# Altium PCB MCU-MUSIC PLAYER.pcbdoc
Units mil, origin at the board's own origin, x right, y up, seen from the top; angles counter-clockwise.
Board outline 3675.92 x 2845 mil, 2 copper layers (Top Layer, Bottom Layer); 23 components, 44 nets, 122 pads, 12 vias.
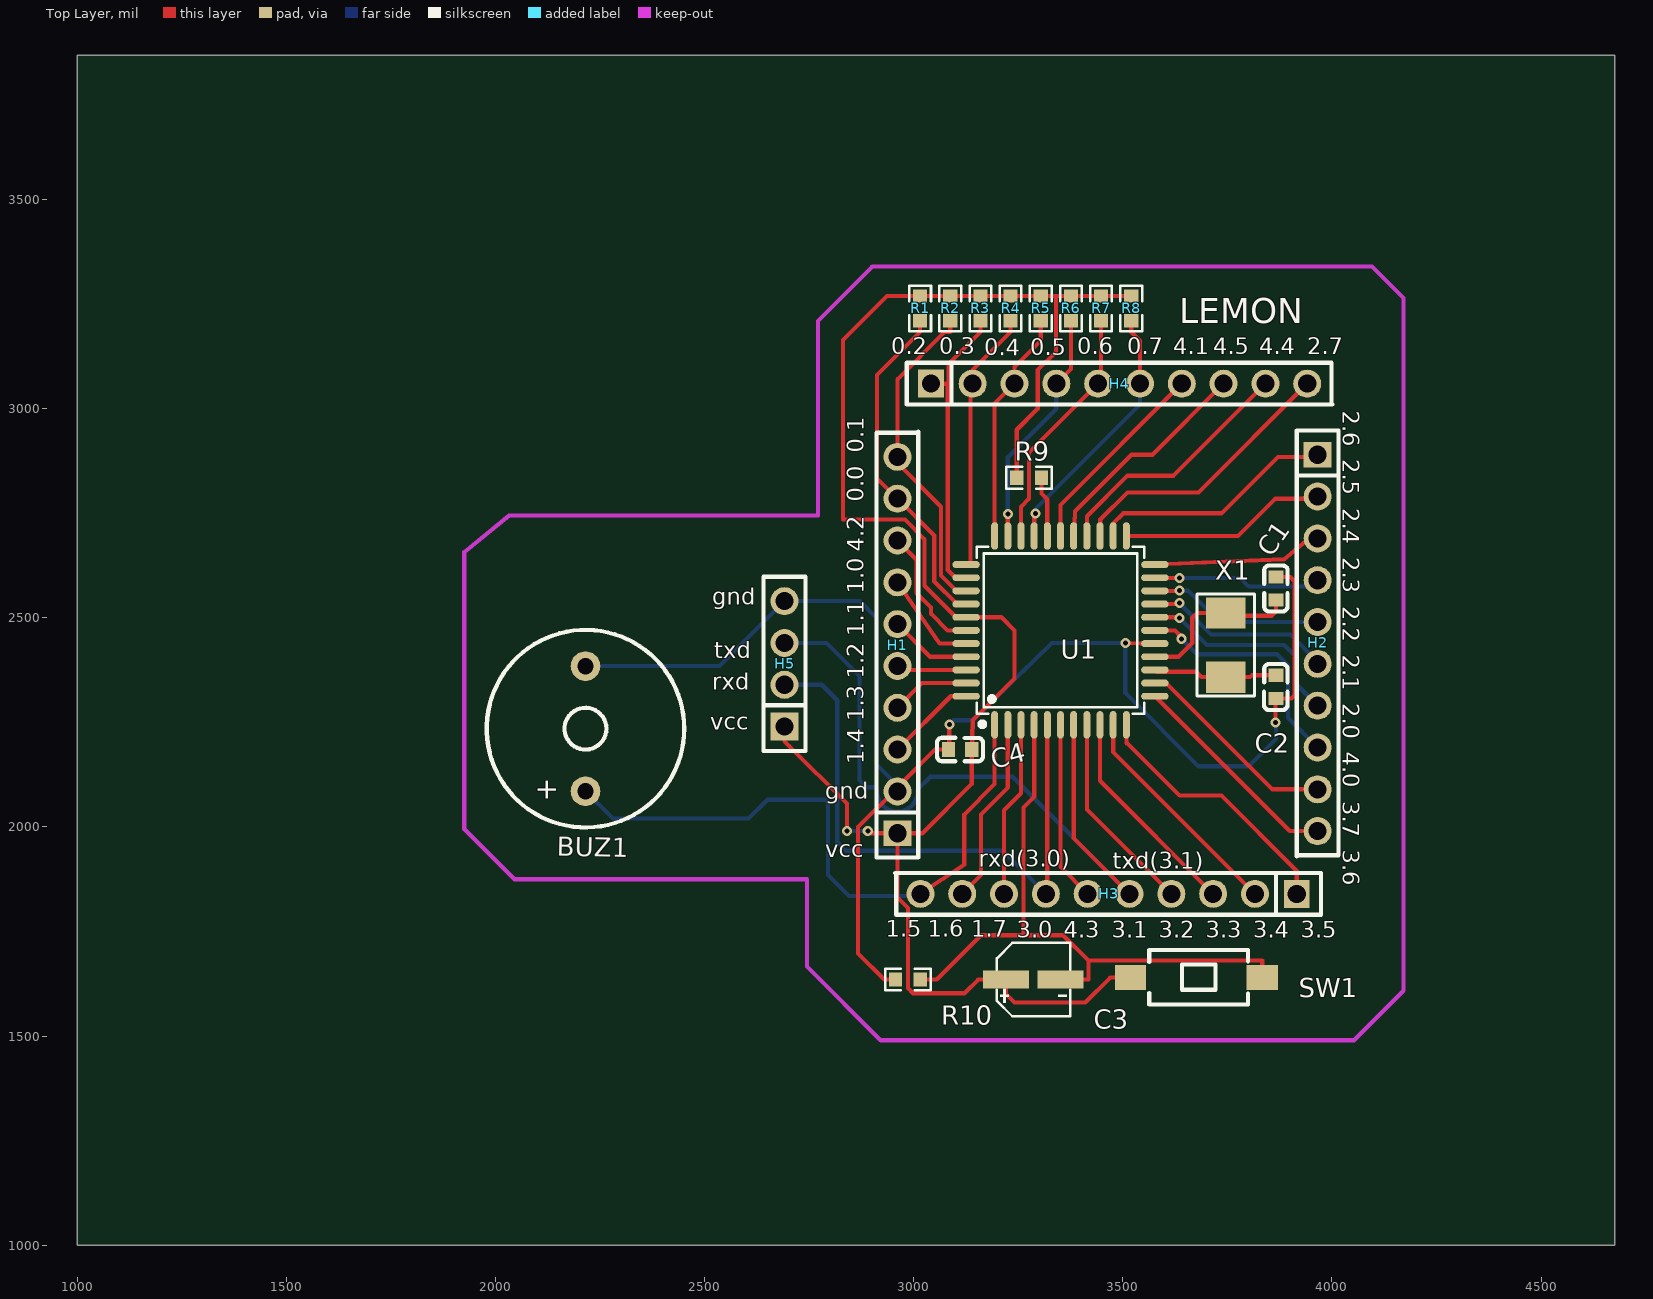
[diagram p0: Top Layer view]
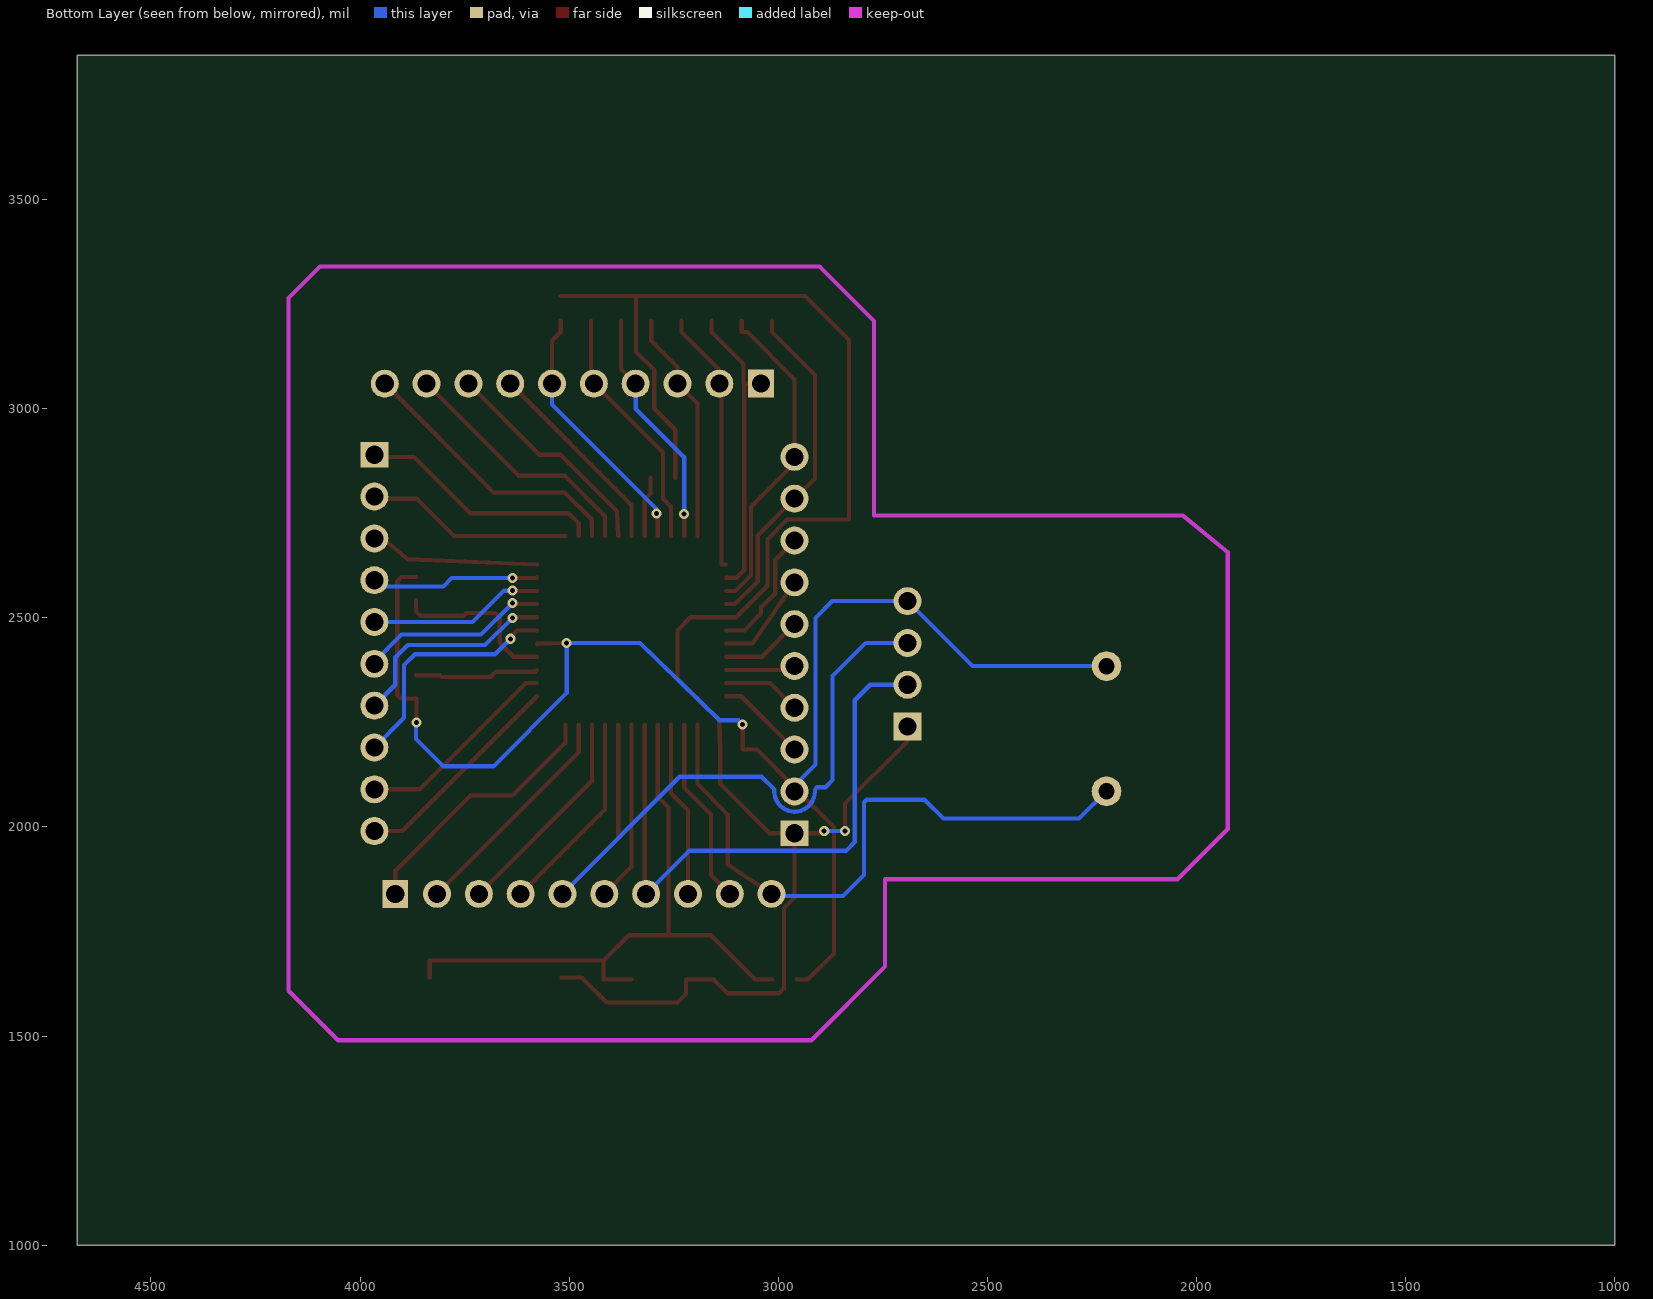
[diagram p1: Bottom Layer view, seen from below]

## Layer stack, top to bottom
Top Solder: solder mask 0.4, Solder Resist, Dk 3.5
Top Layer: signal copper 1.4
Dielectric1: dielectric 12.6, FR-4, Dk 4.8
Bottom Layer: signal copper 1.4
Bottom Solder: solder mask 0.4, Solder Resist, Dk 3.5

## Board outline
4675.92,1000 1000,1000 1000,3845 4675.92,3845

## Design rules (kind name [scope] priority, off if disabled: settings)
Clearance [All] p1: gap=6 ignorepadtopadclearanceinfootprint=FALSE except(66: THPad-Text)
PolygonConnect [All] p1: connectstyle=Relief reliefconductorwidth=10 reliefentries=4 polygonreliefangle="90 Angle" airgapwidth=10
RoutingVias [All] p1: holewidth=28 width=50 viastyle="Through Hole" minholewidth=28 minwidth=50 maxholewidth=28 maxwidth=50
SolderMaskExpansion [All] p1: expansion=4 istentingtop=FALSE
SupplyNets "Schematic Supply Nets_1" [InNet('GND')] p1: voltage=0.000
SupplyNets "Schematic Supply Nets" [InNet('VCC')] p2: voltage=0.000
Width [All] p1: maxlimit=10 minlimit=10 preferedwidth=10
30 further rules are at their usual default settings.

## Components (designator, comment, footprint, x,y, rotation, side; value= is the part's Value field where it differs from the comment)
BUZ1 "2.4kHz" BUZ-TH_BD12.0-P7.60-D0.6-FD 2215,2235 r90 top
C1 "22pf" C0603 3865.92,2570 r270 top
C2 "22pf" C0603 3865.92,2335 r90 top
C3 "10uF" CAP-SMD_BD4.0-L4.3-W4.3-LS5.0-FD 3285.92,1635 r0 top
C4 "0.1u" C0603 3110.92,2185 r0 top
H1 "PZ254-1-10-Z-8.5" HDR-TH_10P-P2.54-V-M 2960.92,2435 r90 top
H2 "PZ254-1-10-Z-8.5" HDR-TH_10P-P2.54-V-M 3965.92,2440 r270 top
H3 "PZ254-1-10-Z-8.5" HDR-TH_10P-P2.54-V-M 3465.92,1840 r180 top
H4 "PZ254-1-10-Z-8.5" HDR-TH_10P-P2.54-V-M 3490.92,3060 r0 top
H5 "Header-Male-2.54_1x4" HDR-TH_4P-P2.54-V-M 2690.92,2390 r90 top
R1 "10k" R0603 3015.22,3240 r90 top
R2 "10k" R0603 3087.32,3240 r90 top
R3 "10k" R0603 3159.52,3240 r90 top
R4 "10k" R0603 3231.62,3240 r90 top
R5 "10k" R0603 3303.82,3240 r90 top
R6 "10k" R0603 3375.92,3240 r90 top
R7 "10k" R0603 3448.02,3240 r90 top
R8 "10k" R0603 3520.22,3240 r90 top
R9 "4.7k" R0603 3275.92,2835 r180 top
R10 "10k" R0603 2985.92,1635 r0 top
SW1 "S" SW-SMD_L6.0-W3.3-LS8.0 3675.92,1640 r180 top
U1 "STC89C52RC-40I_C8707" LQFP-44_L10.0-W10.0-P0.80-LS12.0-BL 3350.92,2470 r0 top
X1 "11.0952" CRYSTAL-SMD_2P-L5.0-W3.2 3745.92,2435 r270 top

## Footprints (in the part's own frame and the unit in brackets; to place one, negate y for a bottom-side part, rotate by r counter-clockwise, add the part's x,y. Pads: shape width x height; smd on the part's side, far side on the other; paste and mask are expansions set on the pad)
BUZ-TH_BD12.0-P7.60-D0.6-FD [mm]
  round 1.8 hole 1 paste-2539.97: 1(-3.8,0) 2(3.8,0)
  silkscreen extent -6,-6 6,6
C0603 [mm]
  rect 0.8x0.9 smd paste+0 mask+0.051: 1(-0.7,0) 2(0.7,0)
  silkscreen extent -1.41,-0.71 1.39,0.72
CAP-SMD_BD4.0-L4.3-W4.3-LS5.0-FD [mm]
  rect 2.8x1.1 smd paste+0 mask+0.051: 1(-1.66,0) 2(1.66,0)
  silkscreen extent -2.22,-2.23 2.24,2.23
CRYSTAL-SMD_2P-L5.0-W3.2 [mm]
  rect 1.9x2.4 smd paste+0 mask+0.051: 1(-1.95,0) 2(1.95,0)
  silkscreen extent -3.1,-1.75 3.1,1.75
HDR-TH_4P-P2.54-V-M [mm]
  rect 1.7x1.7 hole 1.1 paste-2539.97 mask+0.051: 1(-3.81,0)
  round 1.7 hole 1.1 paste-2539.97 mask+0.051: 2(-1.27,0) 3(1.27,0) 4(3.81,0)
  silkscreen extent -5.29,-1.27 5.29,1.27
HDR-TH_10P-P2.54-V-M [mm]
  rect 1.575x1.7 hole 1.1 paste-2539.97 mask+0.051: 1(-11.43,0)
  round 1.7 hole 1.1 paste-2539.97 mask+0.051: 2(-8.89,0) 3(-6.35,0) 4(-3.81,0) 5(-1.27,0) 6(1.27,0) 7(3.81,0) 8(6.35,0) 9(8.89,0) 10(11.43,0)
  silkscreen extent -12.9,-1.27 12.95,1.27
LQFP-44_L10.0-W10.0-P0.80-LS12.0-BL [mm]
  oval 0.42x1.67 smd paste+0 mask+0.051: 1(-4,-5.735) 2(-3.2,-5.735) 3(-2.4,-5.735) 4(-1.6,-5.735) 5(-0.8,-5.735) 6(0,-5.735) 7(0.8,-5.735) 8(1.6,-5.735) 9(2.4,-5.735) 10(3.2,-5.735) 11(4,-5.735) 23(4,5.735) 24(3.2,5.735) 25(2.4,5.735) 26(1.6,5.735) 27(0.8,5.735) 28(0,5.735) 29(-0.8,5.735) 30(-1.6,5.735) 31(-2.4,5.735) 32(-3.2,5.735) 33(-4,5.735)
  oval 1.67x0.42 smd paste+0 mask+0.051: 12(5.735,-4) 13(5.735,-3.2) 14(5.735,-2.4) 15(5.735,-1.6) 16(5.735,-0.8) 17(5.735,0) 18(5.735,0.8) 19(5.735,1.6) 20(5.735,2.4) 21(5.735,3.2) 22(5.735,4) 34(-5.735,4) 35(-5.735,3.2) 36(-5.735,2.4) 37(-5.735,1.6) 38(-5.735,0.8) 39(-5.735,0) 40(-5.735,-0.8) 41(-5.735,-1.6) 42(-5.735,-2.4) 43(-5.735,-3.2) 44(-5.735,-4)
  silkscreen extent -5.08,-5.85 5.08,5.08
R0603 [mil]
  rect 31.75x34.02 smd paste-3937.01 mask+2: 1(-29.66,0) 2(29.66,0)
  silkscreen extent -55,-26 55,26
SW-SMD_L6.0-W3.3-LS8.0 [mm]
  rect 1.9x1.5 smd paste+0 mask+0.051: 1(-4,0) 2(4,0)
  silkscreen extent -3.14,-1.67 2.86,1.63

## Part data
BUZ1: library part TMB12A05_C96093, "驱动方式:有源(内含驱动线路);构造类型:电磁式;额定电压:-;频率:2.4kHz;声压(SPL):85dB;", Current Consumption=-, JLCPCB Part Class=扩展库, LCSC Part Name=TMB12A05, Manufacturer=华能, Voltage - Supply=4V~8V, AddInBom=yes, ConvertToPcb=yes, Datasheet=https://atta.szlcsc.com/upload/public/pdf/source/20241025/8A17FE04D767D19A35A06DEF9A82AB1E.pdf, Device=TMB12A05_C96093, Diameter(φD)=12mm, Driver Circuitry=有源(内含驱动线路), FootprintName=BUZ-TH_BD12.0-P7.60-D0.6-FD, Height=9.8mm, Length=-, ManufacturerPart=TMB12A05, ModelId=16ab50e14c5b4f2c986c135bdba60e37, ModelName=BUZ-TH_D12.0-H9.5-P7.60, ModelTransform=472.44,472.176,0,90,0,0,-0.787,0,-177.165, Operating Temperature=-, Sound Pressure Level(SPL)=85dB, Supplier=LCSC, Supplier Footprint=插件,D=12mm, SupplierPart=C96093, Symbol=TMB12A05, Technology=电磁式, Voltage Rating=-, Width=-
C3: JLCPCB Part Class="Extended Part", Manufacturer=HONOR, Manufacturer Part=RVT1V100M0405, nameAlias=Capacitance, spicePre=C, spiceSymbolName=RVT1V100M0405, Supplier=LCSC, Supplier Part=C86602
H1 H2 H3 H4: Manufacturer=HCTL(华灿天禄), Contributor=LCSC, Manufacturer Part=PZ254-1-10-Z-8.5, spicePre=H, spiceSymbolName=PZ254-1-10-Z-8.5, Supplier=LCSC, Supplier Part=C2894933
H5: JLCPCB Part Class="Extended Part", Manufacturer=Ckmtw, Manufacturer Part="210S-1*4P L=11.6MMGold-plated black", Contributor=LCSC, spicePre=H, spiceSymbolName=Header-Male-2.54_1x4, Supplier=LCSC, Supplier Part=C124378
SW1: JLCPCB Part Class="Extended Part", Manufacturer="XKB Connectivity(中国星坤)", Manufacturer Part=TS-1101-C-W, Contributor=LCSC, spicePre=S, spiceSymbolName=TS-1101-C-W, Supplier=LCSC, Supplier Part=C318938
U1: JLCPCB Part Class="Extended Part", Manufacturer=STC, Manufacturer Part=STC89C52RC-40I, spicePre=U, spiceSymbolName=STC89C52RC-40I_C8707, Supplier=LCSC, Supplier Part=C8707
X1: JLCPCB Part Class="Extended Part", Manufacturer="Zhejiang Abel Elec", Manufacturer Part="SMD-5032_2P 27.12M 15pF", Contributor=LCSC, nameAlias=Frequency, spicePre=X, spiceSymbolName="SMD-5032_2P 27.12M 15pF", Supplier=LCSC, Supplier Part=C362484
C1 C2 C4: Contributor=LCEDA_Lib, nameAlias=Value(F), spicePre=C, spiceSymbolName=C_0603_US
R1 R2 R3 R4 R5 R6 R7 R8 R9 R10: Contributor=LCEDA_Lib, nameAlias=Value(Ω), spicePre=R, spiceSymbolName=R_0603_EU

## Via types
v1: diameter 24, hole 12, Top Layer to Bottom Layer, 10 vias
v2: diameter 24.02, hole 12.01, Top Layer to Bottom Layer, 2 vias

## Nets (pads, with @x,y where several pads share a name; then routed paths per layer and width w, separated by ;. In a path a pad name is that pad's centre, name@x,y a point inside that pad or via, vN(x,y) a via of type N, cw(c..) or ccw(c..) an arc to the next point about the centre after c; other vN are vias at no path point)
GND: BUZ1.2 C1.1 C2.1 C4.1 H1.2 H5.4 R10.1 U1.16 | length 3608.3
  Top Layer w10: R10.1 2929.32,1635 2867,1697.32 2867,1999.53 2952.47,2085 H1.2 2960.92,2095 3050.92,2185 C4.1 3085,2186.64 v1(3085,2245) ; v1(3505.92,2440) U1.16@3576.71,2438 ; v1(3865,2250) 3865,2306.52 C2.1 ; C2.1 3903.32,2307.4 3910.92,2315 3910.92,2587.6 3900.92,2597.6 C1.1
  Bottom Layer w10: BUZ1.2 2535.53,2384.61 2640.92,2490 H5.4 2870.92,2540 2910.92,2500 2910.92,2149.08 2960.92,2099.08 H1.2 ; v1(3085,2245) 3095,2255 3140.92,2255 3330.33,2440 v1(3505.92,2440) 3505.92,2320 3680.92,2145 3800.92,2145 3865.92,2210 3865.92,2249.08 v1(3865,2250)
P0.0: H1.9 R1.1 U1.37 | length 820.9
  Top Layer w10: R1.1 3015.21,3183.4 2912.39,3080.58 2912.39,2833.53 H1.9 3049,2696.92 3049,2587.14 3103.15,2532.99 U1.37
P0.1: H1.10 R2.1 U1.36 | length 787.6
  Top Layer w10: R2.1@3087.35,3210.34 3087.35,3183.4 3073.88,3183.4 2960.92,3070.44 H1.10 2960.92,2870 3065.12,2765.8 3065.12,2601.5 3102.12,2564.5 U1.36
P0.2: H4.1 R3.1 U1.35 | length 723.1
  Top Layer w10: H4.1 3082.99,3060 ; U1.35 3099.52,2596 3081.22,2614.3 3081.22,3060 3083.02,3060 ; R3.1 3159.49,3183.4 3083.02,3106.9 3083.02,3060
P0.3: H4.2 R4.1 U1.34 | length 636.2
  Top Layer w10: U1.34 3135.92,2627.5 3135.92,3060 H4.2 3140.92,3092.68 3231.64,3183.4 R4.1
P0.4: H4.3 R5.1 U1.33 | length 560.2
  Top Layer w10: U1.33 3193.44,3012.52 H4.3 3240.92,3100 3303.82,3162.9 R5.1
P0.5: H4.4 R6.1 U1.32 | length 577.1
  Top Layer w10: U1.32 v2(3224.94,2748.33) ; H4.4 3375.92,3095 R6.1
  Bottom Layer w10: v2(3224.94,2748.33) 3224.92,2884 3340.92,3000 H4.4
P0.6: H4.5 R7.1 U1.31 | length 593.9
  Top Layer w10: U1.31 3256.42,2765.5 3275.92,2785 3275.92,2895 H4.5 3448.06,3067.14 R7.1@3448.06,3210.34
P0.7: H4.6 R8.1 U1.30 | length 627.9
  Top Layer w10: U1.30 3287.93,2747.01 v2(3290.92,2750) ; R8.1 3520.21,3183.4 3540.92,3162.69 H4.6
  Bottom Layer w10: v2(3290.92,2750) 3290.92,2760 3540.92,3010 H4.6
P1.0: H1.7 U1.40 | length 241
  Top Layer w10: H1.7 3062.22,2438.5 U1.40
P1.1: H1.6 U1.41 | length 196.5
  Top Layer w10: H1.6 3038.91,2407.01 U1.41
P1.2: H1.5 U1.42 | length 168.1
  Top Layer w10: H1.5 2970.41,2375.51 U1.42
P1.3: H1.4 U1.43 | length 188.7
  Top Layer w10: H1.4 3019.94,2344.02 U1.43
P1.4: H1.3 U1.44 | length 217
  Top Layer w10: H1.3 3088.44,2312.52 U1.44
P1.5: BUZ1.1 H3.10 U1.1 | length 1536.4
  Top Layer w10: H3.10 3120.92,1910 3120.92,2030 3193.42,2102.5 U1.1
  Bottom Layer w10: BUZ1.1 2280.39,2020 2605,2020 2650,2065 2789.14,2065 2795,2059.14 2795,1885 2845,1835 3010.92,1835 H3.10
P1.6: H3.9 U1.2 | length 449.3
  Top Layer w10: H3.9 3160.92,1885 3160.92,2030 3224.92,2094 U1.2
P1.7: H3.8 U1.3 | length 421
  Top Layer w10: H3.8 3215.92,2040 3256.42,2080.5 U1.3
P2.0: H2.7 U1.18 | length 514.9
  Top Layer w10: U1.18 3634.42,2501.5 v1(3635.92,2500)
  Bottom Layer w10: v1(3635.92,2500) 3700.92,2435 3885.92,2435 3915.92,2405 3915.92,2340 H2.7
P2.1: H2.6 U1.19 | length 453
  Top Layer w10: U1.19 3633.91,2532.99 v1(3635.92,2535)
  Bottom Layer w10: v1(3635.92,2535) 3710.92,2460 3900.92,2460 3965.92,2395 H2.6
P2.2: H2.5 U1.20 | length 420.3
  Top Layer w10: U1.20 v1(3635.92,2565)
  Bottom Layer w10: v1(3635.92,2565) 3655.92,2565 3730.92,2490 H2.5
P2.3: H2.4 U1.21 | length 403.7
  Top Layer w10: U1.21 v1(3635.92,2595)
  Bottom Layer w10: v1(3635.92,2595) 3780.92,2595 3800.92,2575 3950.92,2575 H2.4
P2.4: H2.3 U1.22 | length 407.6
  Top Layer w10: U1.22 3885.92,2640 3945.92,2690 H2.3
P2.5: H2.2 U1.23 | length 496.5
  Top Layer w10: U1.23 3775.42,2695.8 3864.62,2785 3960.92,2785 H2.2
P2.6: H2.1 U1.24 | length 585.1
  Top Layer w10: U1.24 3476.92,2726 3500.92,2750 3735.82,2750 3870.82,2885 H2.1@3965.92,2885
P2.7: H4.10 U1.25 | length 668.8
  Top Layer w10: U1.25 3445.92,2735 3510.92,2800 3680.92,2800 H4.10
P3.0: H3.7 H5.2 U1.5 | length 1436.4
  Top Layer w10: H3.7 3319.42,1843.5 U1.5
  Bottom Layer w10: H5.2 2780,2340 2817,2303 2817,1963.92 2838.02,1942.9 3213.02,1942.9 H3.7
P3.1: H3.5 H5.3 U1.7 | length 1768.1
  Top Layer w10: U1.7 3382.42,1973.5 H3.5
  Bottom Layer w10: H5.3 2790.92,2440 2870,2360.92 2870,2111.92 2883.99,2097.93 2886.92,2095 2906.6,2095 2912.46,2089.14 2912.46,2085 ccw(c2960.92,2085) 3009.39,2085 3009.39,2089.14 3040.24,2120 3235.92,2120 H3.5
P3.2: H3.4 U1.8 | length 487.9
  Top Layer w10: U1.8 3413.91,2042.01 H3.4
P3.3: H3.3 U1.9 | length 516.3
  Top Layer w10: U1.9 3445.41,2110.51 H3.3
P3.4: H3.2 U1.10 | length 544.6
  Top Layer w10: U1.10 3476.9,2179.02 H3.2
P3.5: H3.1 U1.11 | length 633
  Top Layer w10: U1.11 3508.42,2200 3510.92,2200 3635.92,2075 3735.92,2075 3915.92,1895 H3.1
P3.6: H2.10 U1.12 | length 522.8
  Top Layer w10: U1.12 3899.23,1990 H2.10
P3.7: H2.9 U1.13 | length 494.4
  Top Layer w10: U1.13 3603.66,2344.02 3857.68,2090 H2.9
P4.0: H2.8 U1.17 | length 581.6
  Top Layer w10: U1.17 3624.58,2470 3637.32,2457.26 3637.32,2452.68 v1(3640,2450)
  Bottom Layer w10: v1(3640,2450) 3677,2413 3868.5,2413 3894.71,2387 3894.71,2261 H2.8
P4.1: H4.7 U1.28 | length 484.3
  Top Layer w10: U1.28 3350.92,2770 H4.7
P4.2: H1.8 U1.39 | length 333.1
  Top Layer w10: H1.8 3007.02,2638.9 3007.02,2558.9 3040.92,2525 3040.92,2510 3080.92,2470 U1.39 ; U1.39@3100.92,2470 U1.39
P4.3: H3.6 U1.6 | length 431.1
  Top Layer w10: U1.6 3350.92,1905 H3.6
P4.4: H4.9 U1.26 | length 605.5
  Top Layer w10: U1.26 3413.92,2743 3510.92,2840 3620.92,2840 H4.9
P4.5: H4.8 U1.27 | length 540.6
  Top Layer w10: U1.27 3385.92,2750 3385.92,2755 3520.92,2890 3570.92,2890 H4.8
P4.6: R9.1 U1.29 | length 144.9
  Top Layer w10: R9.1 3305.62,2797.3 3319.42,2783.5 U1.29
REAST: C3.2 R10.2 SW1.1 U1.4 | length 1552.8
  Top Layer w10: R10.2 3055,1635 3161.1,1741.1 3262.62,1741.1 3262.62,2046.7 3287.92,2072 U1.4 ; 3262.57,1741.1 3356.99,1741.1 3417.49,1680.6 ; C3.2 3417.49,1635 3417.49,1680.6 ; SW1.1 3833.4,1680.6 3417.49,1680.6
VCC: C3.1 C4.2 H1.1 H5.1 R1.2 R2.2 R3.2 R4.2 R5.2 R6.2 R7.2 R8.2 R9.2 SW1.2 U1.38 | length 4291.3
  Top Layer w10: H5.1 2690.92,2205 2700.92,2195 2840,2055.92 v1(2840,1990) ; v1(2890,1990) 2893.79,1990 2898.79,1985 H1.1 ; R1.2 R5.2 R8.2 ; R1.2 2935.92,3269.7 2830.42,3164.2 2830.42,2735 2978.72,2735 3025.92,2687.8 3025.92,2576.9 3101.32,2501.5 U1.38 ; U1.38 3209.42,2501.5 3240.92,2470 3240.92,2355 3140.92,2255 3140.92,2250 C4.2 3138.48,2102.56 3020.92,1985 H1.1 ; R9.2 3246.26,2949.86 3296.38,2999.98 3296.38,3092.69 3339.85,3136.16 3339.85,3269.66 ; SW1.2 3470.02,1640 3410.02,1580 3240.92,1580 3220.52,1600.4 3220.52,1635 3154.36,1635 3121.64,1602.28 2998.04,1602.28 2985.93,1614.39 2985.93,1806.35 2960.92,1831.36 H1.1
  Bottom Layer w10: v1(2840,1990) v1(2890,1990)
X1: C1.2 U1.15 X1.1 | length 401.8
  Top Layer w10: U1.15 3632.92,2407 3665.92,2440 3665.92,2500 3677.72,2511.8 X1.1 3752.7,2505 3840.92,2505 3855.3,2505 3865.92,2515.62 C1.2
X2: C2.2 U1.14 X1.2 | length 298.2
  Top Layer w10: U1.14 3580.91,2371.31 3674.53,2371.31 3687.6,2358.24 X1.2 3775.08,2358.24 3804.23,2358.24 3808.55,2362.56 C2.2

## Keep-outs
Keep-Out Layer:
  lines w10: 1925,1995 1925,2657.19 2033.08,2745 2770.92,2745 2770.92,2930 2770.92,3210 2900.92,3340 4095.92,3340 4170.92,3265 4170.92,1608.4 4052.52,1490 2920.92,1490 2745,1665.92 2745,1875 2650,1875 2510.92,1875 2045,1875 1925,1995

## Silkscreen, mask and mechanical layers (free items; w line width, h text height)
Top Overlay:
  text "LEMON" at 3635,3205 h60
  text "0.2" at 2945.92,3130.32 h39.37
  text "0.3" at 3060.92,3130.32 h39.37
  text "0.6" at 3390.92,3130.32 h39.37
  text "0.7" at 3510.92,3130.32 h39.37
  text "4.1" at 3620.92,3130.32 h39.37
  text "4.5" at 3715.92,3130.32 h39.37
  text "4.4" at 3825.92,3130.32 h39.37
  text "2.7" at 3940.92,3130.32 h39.37
  text "0.4" at 3168.07,3127.93 h39.37 r359.48
  text "0.5" at 3278,3128 h39.37
  text "2.6" at 4026.24,2995 h39.37 r270
  text "0.1" at 2880.61,2895 h39.37 r90
  text "2.5" at 4026.24,2878.73 h39.37 r270
  text "0.0" at 2880.61,2777.59 h39.37 r90
  text "2.4" at 4026.24,2762.47 h39.37 r270
  text "4.2" at 2880.61,2658.37 h39.37 r90
  text "2.3" at 4026.24,2644.4 h39.37 r270
  text "1.0" at 2880.61,2557.06 h39.37 r90
  text "gnd" at 2518,2531.12 h39.37
  text "2.2" at 4026.24,2528.13 h39.37 r270
  text "1.1" at 2880.61,2455.74 h39.37 r90
  text "2.1" at 4026.24,2411.87 h39.37 r270
  text "txd" at 2523,2403 h39.37
  text "1.2" at 2880.61,2354.43 h39.37 r90
  text "rxd" at 2518,2328 h39.37
  text "2.0" at 4026.24,2295.6 h39.37 r270
  text "1.3" at 2880.61,2253.11 h39.37 r90
  text "vcc" at 2513,2233 h39.37
  text "4.0" at 4026.24,2179.33 h39.37 r270
  text "1.4" at 2880.61,2150 h39.37 r90
  text "gnd" at 2787.77,2066.2 h39.37 r0.61
  text "3.7" at 4026.24,2061.27 h39.37 r270
  text "3.6" at 4026.24,1945 h39.37 r270
  text "vcc" at 2788,1928 h39.37
  text "rxd(3.0)" at 3155.92,1905.32 h39.37
  text "txd(3.1)" at 3475.92,1900.32 h39.37
  text "1.5" at 2933,1738 h39.37
  text "1.6" at 3033,1738 h39.37
  text "1.7" at 3138,1738 h39.37
  text "3.0" at 3245.92,1735.32 h39.37
  text "4.3" at 3358.66,1735.32 h39.37
  text "3.1" at 3473.21,1735.32 h39.37
  text "3.2" at 3585.95,1735.32 h39.37
  text "3.3" at 3698.7,1735.32 h39.37
  text "3.4" at 3811.44,1735.32 h39.37
  text "3.5" at 3925.98,1735.32 h39.37

## Text inside footprints (layer, text, board x,y; h text height)
BUZ1: Top Overlay "+" at 2145.5,2060.01 h50 r90